# Altium PCB 14X18_Panel_RouteTool_D.PcbDoc
Units mil, origin at the board's own origin, x right, y up, seen from the top; angles counter-clockwise.
Board outline 18000 x 14000 mil, 2 copper layers (Top Layer, Bottom Layer); 51 components, 1 nets, 312 pads, 0 vias.
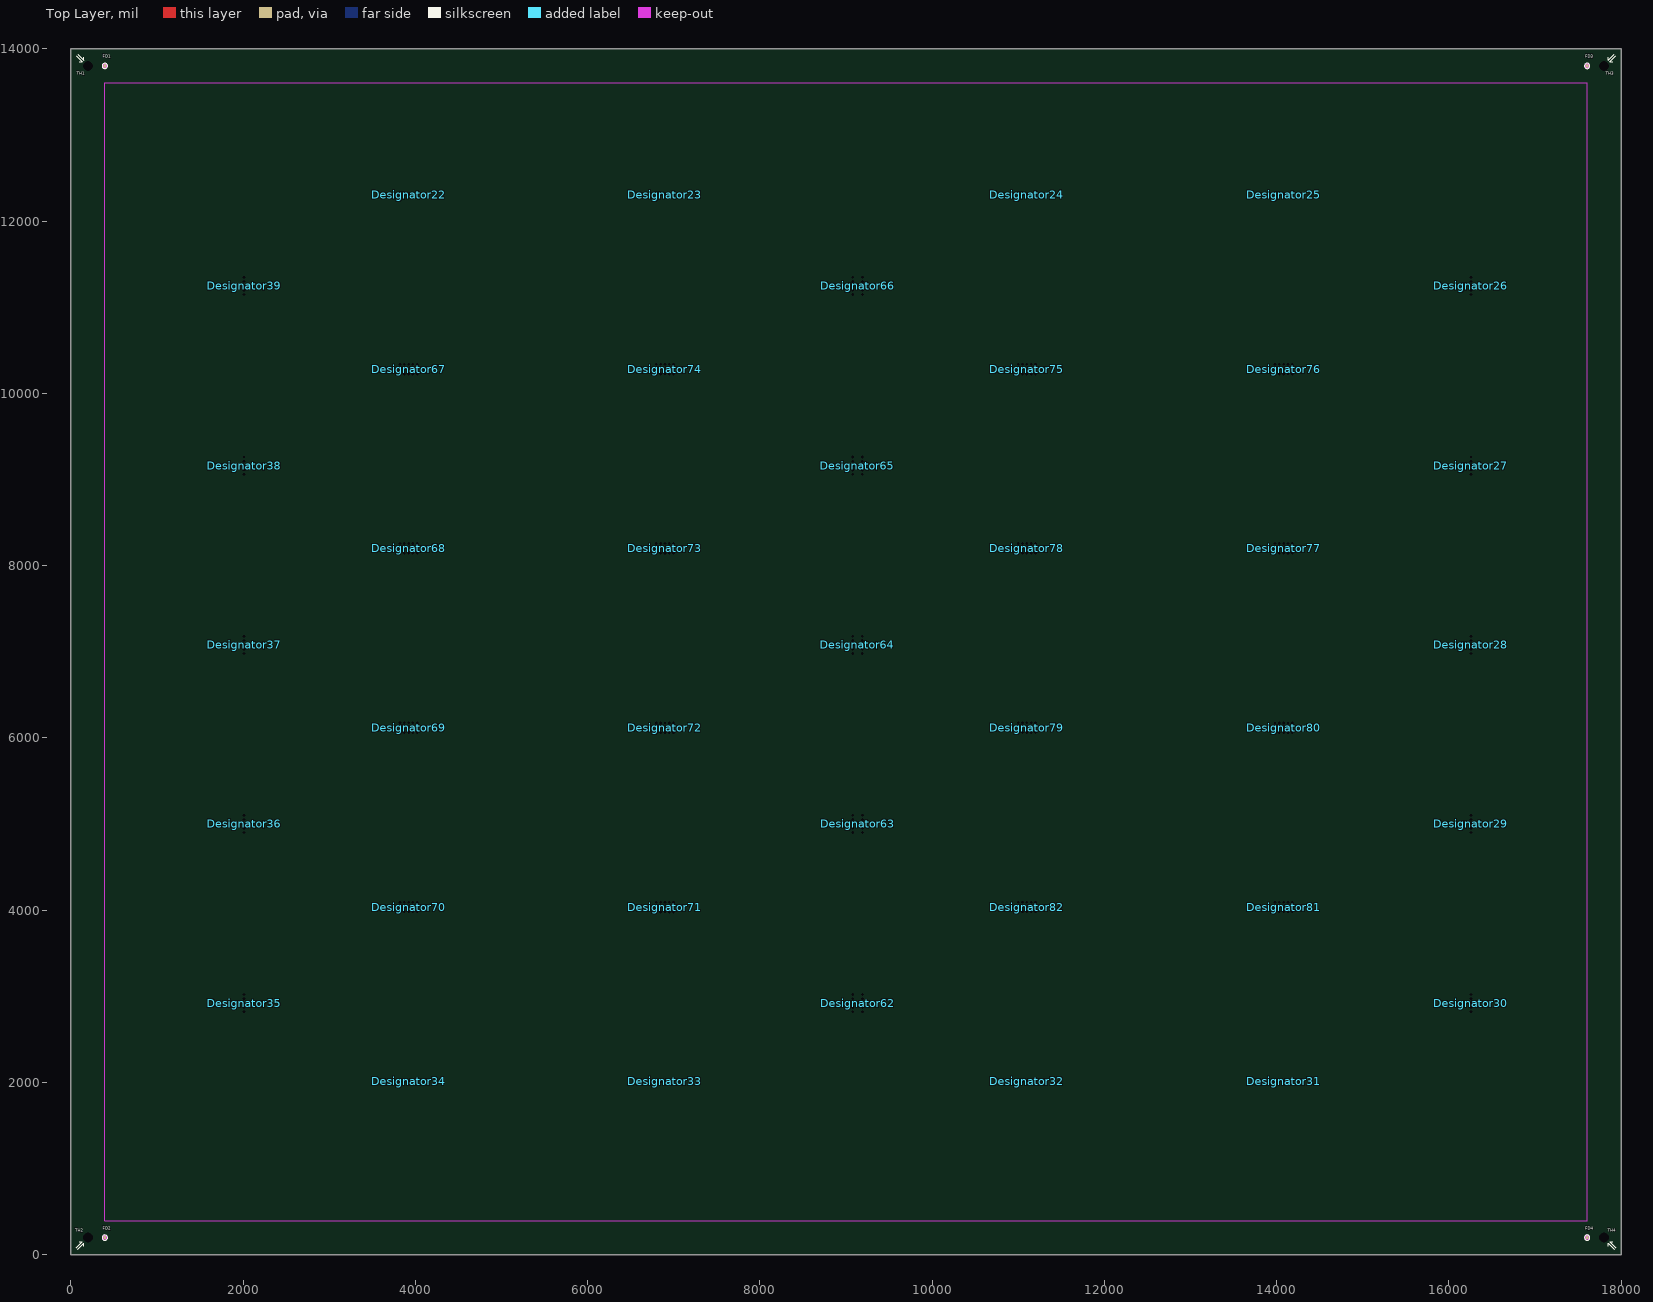
[diagram p0: Top Layer view]
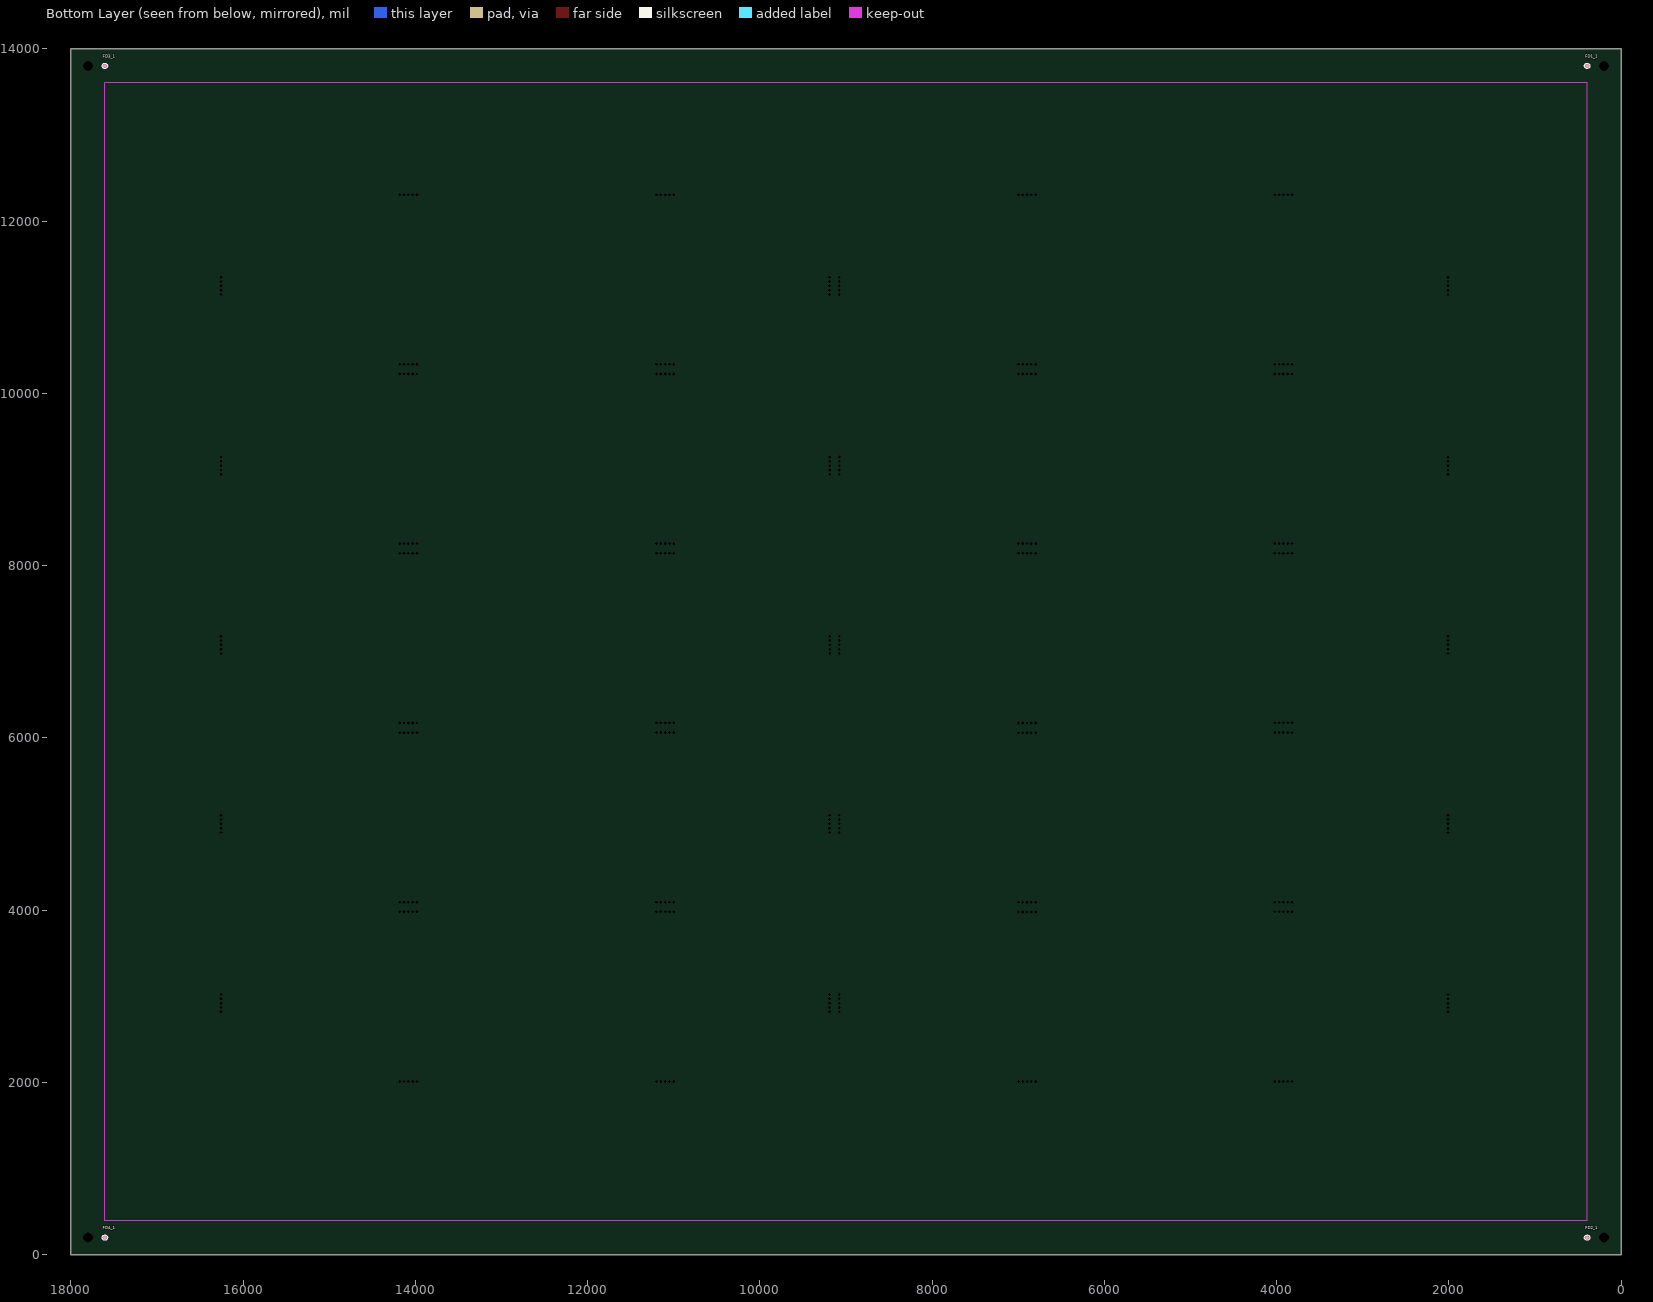
[diagram p1: Bottom Layer view, seen from below]

## Layer stack, top to bottom
Top Solder: solder mask 0.4, Solder Resist, Dk 3.5
Top Layer: signal copper 1.4
Dielectric1: core 12.6, FR-4, Dk 4.8
Bottom Layer: signal copper 1.4
Bottom Solder: solder mask 0.4, Solder Resist, Dk 3.5

## Board outline
0,0 18000,0 18000,14000 0,14000

## Design rules (kind name [scope] priority, off if disabled: settings)
Clearance [All] p1: gap=1 ignorepadtopadclearanceinfootprint=FALSE except(0: Arc-Hole Track-Hole SMDPad-Hole THPad-Hole Via-Hole Fill-Hole Poly-Hole Region-Hole Text-Hole)
PolygonConnect [All] p1: connectstyle=Relief reliefconductorwidth=10 reliefentries=4 polygonreliefangle="90 Angle" airgapwidth=10
RoutingVias [All] p1: holewidth=28 width=50 viastyle="Through Hole" minholewidth=28 minwidth=50 maxholewidth=28 maxwidth=50
SilkToSolderMaskClearance SilkscreenOverComponentPads [IsPad] p1: minsilkscreentomaskgap=2 clearancetoexposedcopper=TRUE
SolderMaskExpansion [All] p1: expansion=4 istentingtop=FALSE
Width [All] p1: maxlimit=10 minlimit=10 preferedwidth=10
29 further rules are at their usual default settings.

## Components (designator, comment, footprint, x,y, rotation, side; value= is the part's Value field where it differs from the comment)
Designator22 "Comment" SINGLE_SIDE_BREAKOUT 3800.63,12365.14 r180 top
Designator23 "Comment" SINGLE_SIDE_BREAKOUT 6777.58,12365.14 r180 top
Designator24 "Comment" SINGLE_SIDE_BREAKOUT 10979.77,12365.14 r180 top
Designator25 "Comment" SINGLE_SIDE_BREAKOUT 13962.12,12365.14 r180 top
Designator26 "Comment" SINGLE_SIDE_BREAKOUT 16314.15,11369.78 r90 top
Designator27 "Comment" SINGLE_SIDE_BREAKOUT 16314.15,9281.76 r90 top
Designator28 "Comment" SINGLE_SIDE_BREAKOUT 16314.15,7200.3 r90 top
Designator29 "Comment" SINGLE_SIDE_BREAKOUT 16314.15,5121.43 r90 top
Designator30 "Comment" SINGLE_SIDE_BREAKOUT 16314.15,3039.62 r90 top
Designator31 "Comment" SINGLE_SIDE_BREAKOUT 14202.12,1953.5 r0 top
Designator32 "Comment" SINGLE_SIDE_BREAKOUT 11219.77,1953.5 r0 top
Designator33 "Comment" SINGLE_SIDE_BREAKOUT 7017.58,1953.5 r0 top
Designator34 "Comment" SINGLE_SIDE_BREAKOUT 4040.63,1953.5 r0 top
Designator35 "Comment" SINGLE_SIDE_BREAKOUT 1953.5,2799.62 r270 top
Designator36 "Comment" SINGLE_SIDE_BREAKOUT 1953.5,4881.43 r270 top
Designator37 "Comment" SINGLE_SIDE_BREAKOUT 1953.5,6960.3 r270 top
Designator38 "Comment" SINGLE_SIDE_BREAKOUT 1953.5,9041.76 r270 top
Designator39 "Comment" SINGLE_SIDE_BREAKOUT 1953.5,11129.78 r270 top
Designator62 "Comment" DOUBLE_SIDE_BREAKOUT 9134.54,2799.62 r270 top
Designator63 "Comment" DOUBLE_SIDE_BREAKOUT 9134.54,4881.43 r270 top
Designator64 "Comment" DOUBLE_SIDE_BREAKOUT 9133.12,6960.3 r270 top
Designator65 "Comment" DOUBLE_SIDE_BREAKOUT 9133.12,9041.76 r270 top
Designator66 "Comment" DOUBLE_SIDE_BREAKOUT 9134.54,11129.78 r270 top
Designator67 "Comment" DOUBLE_SIDE_BREAKOUT 4040.63,10282.53 r0 top
Designator68 "Comment" DOUBLE_SIDE_BREAKOUT 4040.63,8199.92 r0 top
Designator69 "Comment" DOUBLE_SIDE_BREAKOUT 4040.63,6118.72 r0 top
Designator70 "Comment" DOUBLE_SIDE_BREAKOUT 4040.63,4036.11 r0 top
Designator71 "Comment" DOUBLE_SIDE_BREAKOUT 7017.58,4034.69 r0 top
Designator72 "Comment" DOUBLE_SIDE_BREAKOUT 7017.58,6117.3 r0 top
Designator73 "Comment" DOUBLE_SIDE_BREAKOUT 7017.58,8201.34 r0 top
Designator74 "Comment" DOUBLE_SIDE_BREAKOUT 7017.58,10282.53 r0 top
Designator75 "Comment" DOUBLE_SIDE_BREAKOUT 11219.77,10282.53 r0 top
Designator76 "Comment" DOUBLE_SIDE_BREAKOUT 14202.12,10282.53 r0 top
Designator77 "Comment" DOUBLE_SIDE_BREAKOUT 14202.12,8199.92 r0 top
Designator78 "Comment" DOUBLE_SIDE_BREAKOUT 11219.77,8199.92 r0 top
Designator79 "Comment" DOUBLE_SIDE_BREAKOUT 11219.77,6118.72 r0 top
Designator80 "Comment" DOUBLE_SIDE_BREAKOUT 14202.12,6117.3 r0 top
Designator81 "Comment" DOUBLE_SIDE_BREAKOUT 14202.12,4036.11 r0 top
Designator82 "Comment" DOUBLE_SIDE_BREAKOUT 11219.77,4036.11 r0 top
FD1 "Comment" FD_1.20MM 393.7,13803.15 r0 top
FD1_1 "Comment" FD_1.20mm 393.7,13803.15 r0 bottom
FD2 "Comment" FD_1.20MM 393.7,196.85 r0 top
FD2_1 "Comment" FD_1.20mm 393.7,196.85 r0 bottom
FD3 "Comment" FD_1.20MM 17606.3,13803.15 r0 top
FD3_1 "Comment" FD_1.20mm 17606.3,13803.15 r0 bottom
FD4 "Comment" FD_1.20MM 17606.3,196.85 r0 top
FD4_1 "Comment" FD_1.20mm 17606.3,196.85 r0 bottom
TH1 "Comment" TH_3mm 196.85,13803.15 r135 top
TH2 "Comment" TH_3mm 196.85,196.85 r225 top
TH3 "Comment" TH_3mm 17803.15,13803.15 r45 top
TH4 "Comment" TH_3mm 17803.15,196.85 r315 top

## Footprints (in the part's own frame and the unit in brackets; to place one, negate y for a bottom-side part, rotate by r counter-clockwise, add the part's x,y. Pads: shape width x height; smd on the part's side, far side on the other; paste and mask are expansions set on the pad)
DOUBLE_SIDE_BREAKOUT [mil] "Rout Tool Diameter 93 mil Slice Track 240 Mil"
  round 0 hole 31 unplated: 0(-220,-56.5) 0(-220,56.5) 0(-170,-56.5) 0(-170,56.5) 0(-120,56.5) 0(-120,-56.5) 0(-70,56.5) 0(-70,-56.5) 0(-20,56.5) 0(-20,-56.5)
FD_1.20MM [mm] "1.20 mm Fiducial"
  round 1.2 smd paste+0 mask+0.102: 0(0,0)
  Keep-Out Layer circle w0.127: c0,0 r0.635
  silkscreen extent -0.78,-0.79 0.79,0.79
FD_1.20mm [mm] "1.20 mm Fiducial"
  round 1.2 smd paste+0 mask+0.102: 0(0,0)
  Keep-Out Layer circle w0.127: c0,0 r0.635
  silkscreen extent -0.78,-0.79 0.79,0.79
SINGLE_SIDE_BREAKOUT [mil] "Rout Tool Diameter 93 mil Slice Track 240 Mil"
  round 0 hole 31 unplated: 0(-220,56.5) 0(-170,56.5) 0(-120,56.5) 0(-70,56.5) 0(-20,56.5)
TH_3mm [mm] "3 mm Tooling Hole"
  round 0 hole 3 unplated paste+0: 0(0,0)
  silkscreen extent 2.03,-0.89 4.57,0.89

## Nets (pads, with @x,y where several pads share a name; then routed paths per layer and width w, separated by ;. In a path a pad name is that pad's centre, name@x,y a point inside that pad or via, vN(x,y) a via of type N, cw(c..) or ccw(c..) an arc to the next point about the centre after c; other vN are vias at no path point)
NET1: 
pads on no net: Designator22.0 Designator23.0 Designator24.0 Designator25.0 Designator26.0 Designator27.0 Designator28.0 Designator29.0 Designator30.0 Designator31.0 Designator32.0 Designator33.0 Designator34.0 Designator35.0 Designator36.0 Designator37.0 Designator38.0 Designator39.0 Designator62.0 Designator63.0 Designator64.0 Designator65.0 Designator66.0 Designator67.0 Designator68.0 Designator69.0 Designator70.0 Designator71.0 Designator72.0 Designator73.0 Designator74.0 Designator75.0 Designator76.0 Designator77.0 Designator78.0 Designator79.0 Designator80.0 Designator81.0 Designator82.0 FD1.0 FD1_1.0 FD2.0 FD2_1.0 FD3.0 FD3_1.0 FD4.0 FD4_1.0 TH1.0 TH2.0 TH3.0 TH4.0

## Keep-outs
Keep-Out Layer:
  lines w1: 393.7,393.7 17606.3,393.7 17606.3,13606.3 393.7,13606.3 393.7,393.7
  text "KEEP OUT" at 2000,13675.2 h400
  text "KEEP OUT" at 8100,13675.2 h400
  text "KEEP OUT" at 14200,13675.2 h400
  text "KEEP OUT" at 68.9,11000 h400 r270
  text "KEEP OUT" at 17675.2,11000 h400 r270
  text "KEEP OUT" at 68.9,4800 h400 r270
  text "KEEP OUT" at 17675.2,4800 h400 r270
  text "KEEP OUT" at 2000,68.9 h400
  text "KEEP OUT" at 8100,68.9 h400
  text "KEEP OUT" at 14200,68.9 h400

## Silkscreen, mask and mechanical layers (free items; w line width, h text height)
Top Overlay:
  text "Altium Advanced Training: '.Pcb_File_Name_No_Path'" at 15,-1018.35 h200
1_BOARD_OUTLINE:
  the board outline again, w1
Route Tool Path:
  drawing of 180 lines, arcs and shapes, not listed
26_PANEL_DIMENSION:
  lines w10: 17606.3,13803.15 17607.15,13803.15
27_PANEL_FABRICATION_NOTES:
  lines w5: 19592.31,14143.42 19653.56,14143.42 19653.56,14206.47 19592.31,14206.47 19592.31,14143.42 ; 19594.56,13968.24 19655.81,13968.24 19655.81,14031.29 19594.56,14031.29 19594.56,13968.24
  lines w10: 17607.15,13803.15 18226,14422 18893,14422 ; 17803.15,13803.15 18707.85,13803.15 18848.85,13803.15 18892.85,13803.15 ; 18939,13722 19117,13722 19117,13899 18939,13899 18939,13722 ; 18939,14336 18939,14513 19117,14513 19117,14336 18939,14336
  text "2" at 18992.31,14380.84 h180.44
  text "N" at 19604.18,14347.27 h112.15
  text "O" at 19664.13,14347.27 h112.15
  text "T" at 19726.22,14347.27 h112.15
  text "E" at 19771.18,14347.27 h112.15
  text "S" at 19816.14,14347.27 h112.15
  text "U" at 19880.37,14347.27 h112.15
  text "N" at 19940.32,14347.27 h112.15
  text "L" at 20000.27,14347.27 h112.15
  text "E" at 20040.95,14347.27 h112.15
  text "S" at 20085.91,14347.27 h112.15
  text "S" at 20128.73,14347.27 h112.15
  text "O" at 20192.97,14347.27 h112.15
  text "T" at 20255.06,14347.27 h112.15
  text "H" at 20300.02,14347.27 h112.15
  text "E" at 20357.82,14347.27 h112.15
  text "R" at 20402.79,14347.27 h112.15
  text "W" at 20454.17,14347.27 h112.15
  text "I" at 20537.67,14347.27 h112.15
  text "S" at 20561.22,14347.27 h112.15
  text "E" at 20604.04,14347.27 h112.15
  text "S" at 20670.41,14347.27 h112.15
  text "P" at 20713.24,14347.27 h112.15
  text "E" at 20762.48,14347.27 h112.15
  text "C" at 20807.44,14347.27 h112.15
  text "I" at 20856.68,14347.27 h112.15
  text "F" at 20880.24,14347.27 h112.15
  text "I" at 20923.06,14347.27 h112.15
  text "E" at 20946.61,14347.27 h112.15
  text "D" at 20991.57,14347.27 h112.15
  text ":" at 21049.38,14347.27 h112.15
  text "1" at 19616.99,14225.23 h112.15
  text "T" at 19702.41,14225.23 h112.15
  text "O" at 19747.37,14225.23 h112.15
  text "O" at 19809.46,14225.23 h112.15
  text "L" at 19871.55,14225.23 h112.15
  text "I" at 19912.23,14225.23 h112.15
  text "N" at 19935.78,14225.23 h112.15
  text "G" at 19995.73,14225.23 h112.15
  text "H" at 20077.09,14225.23 h112.15
  text "O" at 20134.9,14225.23 h112.15
  text "L" at 20196.99,14225.23 h112.15
  text "E" at 20237.66,14225.23 h112.15
  text "3" at 20304.04,14225.23 h112.15
  text "." at 20351.14,14225.23 h112.15
  text "0" at 20374.69,14225.23 h112.15
  text "0" at 20421.79,14225.23 h112.15
  text "M" at 20490.31,14225.23 h112.15
  text "M" at 20571.67,14225.23 h112.15
  text "O" at 20674.43,14225.23 h112.15
  text "N" at 20736.52,14225.23 h112.15
  text "O" at 20796.47,14225.23 h112.15
  text "-" at 20858.56,14225.23 h112.15
  text "P" at 19702.41,14103.19 h112.15
  text "L" at 19751.65,14103.19 h112.15
  text "A" at 19792.33,14103.19 h112.15
  text "T" at 19845.86,14103.19 h112.15
  text "E" at 19890.82,14103.19 h112.15
  text "D" at 19935.78,14103.19 h112.15
  text "4" at 20015,14103.19 h112.15
  text "P" at 20083.51,14103.19 h112.15
  text "L" at 20132.75,14103.19 h112.15
  text "A" at 20173.43,14103.19 h112.15
  text "C" at 20226.96,14103.19 h112.15
  text "E" at 20276.2,14103.19 h112.15
  text "S" at 20321.16,14103.19 h112.15
  text "2" at 19616.99,13981.15 h112.15
  text "F" at 19702.41,13981.15 h112.15
  text "I" at 19745.23,13981.15 h112.15
  text "D" at 19768.78,13981.15 h112.15
  text "U" at 19826.59,13981.15 h112.15
  text "C" at 19886.54,13981.15 h112.15
  text "I" at 19935.78,13981.15 h112.15
  text "A" at 19959.33,13981.15 h112.15
  text "L" at 20012.86,13981.15 h112.15
  text "1" at 20074.95,13981.15 h112.15
  text "." at 20122.05,13981.15 h112.15
  text "2" at 20145.6,13981.15 h112.15
  text "0" at 20192.7,13981.15 h112.15
  text "M" at 20261.22,13981.15 h112.15
  text "M" at 20342.58,13981.15 h112.15
  text "4" at 20445.34,13981.15 h112.15
  text "P" at 20513.86,13981.15 h112.15
  text "L" at 20563.1,13981.15 h112.15
  text "A" at 20603.78,13981.15 h112.15
  text "C" at 20657.31,13981.15 h112.15
  text "E" at 20706.55,13981.15 h112.15
  text "S" at 20751.51,13981.15 h112.15
  text "1" at 19001.6,13764.53 h180.44
29_PANEL_TITLE_BLOCK:
  drawing of 109 lines, arcs and shapes, not listed
  text "DWG. NO." at 27305.1,18815 h30
  text "REV:" at 28315.1,18815 h30
  text "1" at 1525,18775 h250
  text "2" at 9900,18775 h250
  text "3" at 18250,18775 h250
  text "4" at 26600,18775 h250
  text ".PCB_DWG_NO" at 27520,18725 h50
  text ".PCB_REV" at 28330,18725 h50
  text "T" at -2688,18627.61 h76
  text "H" at -2644.65,18627.61 h76
  text "I" at -2594.64,18627.61 h76
  text "S" at -2574.64,18627.61 h76
  text "D" at -2509.62,18627.61 h76
  text "O" at -2459.61,18627.61 h76
  text "C" at -2404.59,18627.61 h76
  text "U" at -2354.58,18627.61 h76
  text "M" at -2304.57,18627.61 h76
  text "E" at -2246.22,18627.61 h76
  text "N" at -2199.54,18627.61 h76
  text "T" at -2151.2,18627.61 h76
  text "A" at -2087.85,18627.61 h76
  text "N" at -2041.17,18627.61 h76
  text "D" at -1991.16,18627.61 h76
  text "T" at -1922.81,18627.61 h76
  text "H" at -1879.47,18627.61 h76
  text "E" at -1829.45,18627.61 h76
  text "D" at -1764.44,18627.61 h76
  text "A" at -1714.43,18627.61 h76
  text "T" at -1667.75,18627.61 h76
  text "A" at -1626.07,18627.61 h76
  text "D" at -1559.39,18627.61 h76
  text "I" at -1509.37,18627.61 h76
  text "S" at -1491.04,18627.61 h76
  text "C" at -1444.36,18627.61 h76
  text "L" at -1394.35,18627.61 h76
  text "O" at -1356,18627.61 h76
  text "S" at -1300.99,18627.61 h76
  text "E" at -1254.31,18627.61 h76
  text "D" at -1207.63,18627.61 h76
  text "H" at -1139.28,18627.61 h76
  text "E" at -1089.27,18627.61 h76
  text "R" at -1042.59,18627.61 h76
  text "E" at -994.25,18627.61 h76
  text "I" at -947.57,18627.61 h76
  text "N" at -927.57,18627.61 h76
  text "O" at -859.21,18627.61 h76
  text "R" at -804.2,18627.61 h76
  text "REVISIONS" at 28540,18595 h60
  text "H" at -2688,18547.59 h76
  text "E" at -2637.99,18547.59 h76
  text "R" at -2591.31,18547.59 h76
  text "E" at -2541.3,18547.59 h76
  text "W" at -2496.28,18547.59 h76
  text "I" at -2427.93,18547.59 h76
  text "T" at -2409.6,18547.59 h76
  text "H" at -2366.25,18547.59 h76
  text "I" at -2297.9,18547.59 h76
  text "S" at -2277.9,18547.59 h76
  text "T" at -2212.88,18547.59 h76
  text "H" at -2169.54,18547.59 h76
  text "E" at -2119.52,18547.59 h76
  text "P" at -2054.51,18547.59 h76
  text "R" at -2007.83,18547.59 h76
  text "O" at -1957.82,18547.59 h76
  text "P" at -1903.77,18547.59 h76
  text "E" at -1857.09,18547.59 h76
  text "R" at -1810.41,18547.59 h76
  text "T" at -1762.07,18547.59 h76
  text "Y" at -1718.73,18547.59 h76
  text "O" at -1653.71,18547.59 h76
  text "F" at -1600.36,18547.59 h76
  text "A" at -1537.01,18547.59 h76
  text "L" at -1490.34,18547.59 h76
  text "T" at -1453.66,18547.59 h76
  text "I" at -1410.32,18547.59 h76
  text "U" at -1390.31,18547.59 h76
  text "M" at -1340.3,18547.59 h76
  text "L" at -1263.61,18547.59 h76
  text "I" at -1225.27,18547.59 h76
  text "M" at -1205.27,18547.59 h76
  text "I" at -1148.58,18547.59 h76
  text "T" at -1128.58,18547.59 h76
  text "E" at -1085.24,18547.59 h76
  text "D" at -1038.56,18547.59 h76
  text "A" at -970.21,18547.59 h76
  text "N" at -923.53,18547.59 h76
  text "D" at -873.52,18547.59 h76
  text "M" at -803.5,18547.59 h76
  text "A" at -745.15,18547.59 h76
  text "Y" at -700.14,18547.59 h76
  text "ZONE" at 26955,18470 h60
  text "REV" at 27285,18470 h60
  text "DATE" at 29705,18470 h60
  text "B" at -2688,18467.57 h76
  text "E" at -2641.32,18467.57 h76
  text "F" at -2574.64,18467.57 h76
  text "R" at -2531.29,18467.57 h76
  text "E" at -2481.28,18467.57 h76
  text "E" at -2436.27,18467.57 h76
  text "L" at -2389.59,18467.57 h76
  text "Y" at -2351.25,18467.57 h76
  text "D" at -2284.57,18467.57 h76
  text "I" at -2234.55,18467.57 h76
  text "S" at -2216.22,18467.57 h76
  text "T" at -2169.54,18467.57 h76
  text "R" at -2126.88,18467.57 h76
  text "I" at -2078.54,18467.57 h76
  text "B" at -2058.53,18467.57 h76
  text "U" at -2011.86,18467.57 h76
  text "T" at -1961.84,18467.57 h76
  text "E" at -1918.5,18467.57 h76
  text "D" at -1871.82,18467.57 h76
  text "I" at -1803.47,18467.57 h76
  text "N" at -1783.47,18467.57 h76
  text "W" at -1716.78,18467.57 h76
  text "H" at -1648.43,18467.57 h76
  text "O" at -1600.09,18467.57 h76
  text "L" at -1545.07,18467.57 h76
  text "E" at -1506.73,18467.57 h76
  text "." at -1460.05,18467.57 h76
  text "N" at -1421.71,18467.57 h76
  text "O" at -1371.7,18467.57 h76
  text "R" at -1296.68,18467.57 h76
  text "I" at -1248.33,18467.57 h76
  text "G" at -1228.33,18467.57 h76
  text "H" at -1173.32,18467.57 h76
  text "T" at -1124.97,18467.57 h76
  text "S" at -1081.63,18467.57 h76
  text "A" at -1016.61,18467.57 h76
  text "R" at -969.93,18467.57 h76
  text "E" at -919.92,18467.57 h76
  text "DESCRIPTION" at 28300,18465 h60
  text "APPROVED" at 30210,18465 h60
  text "R" at -2688,18387.55 h76
  text "E" at -2637.99,18387.55 h76
  text "S" at -2591.31,18387.55 h76
  text "E" at -2544.63,18387.55 h76
  text "R" at -2497.95,18387.55 h76
  text "V" at -2447.94,18387.55 h76
  text "E" at -2401.26,18387.55 h76
  text "D" at -2354.58,18387.55 h76
  text "O" at -2286.23,18387.55 h76
  text "R" at -2231.22,18387.55 h76
  text "E" at -2161.2,18387.55 h76
  text "X" at -2114.52,18387.55 h76
  text "P" at -2069.51,18387.55 h76
  text "R" at -2022.83,18387.55 h76
  text "E" at -1972.82,18387.55 h76
  text "S" at -1926.14,18387.55 h76
  text "S" at -1879.47,18387.55 h76
  text "O" at -1814.45,18387.55 h76
  text "R" at -1759.44,18387.55 h76
  text "I" at -1691.09,18387.55 h76
  text "M" at -1671.08,18387.55 h76
  text "P" at -1612.73,18387.55 h76
  text "L" at -1566.06,18387.55 h76
  text "I" at -1529.38,18387.55 h76
  text "E" at -1509.37,18387.55 h76
  text "D" at -1462.7,18387.55 h76
  text "W" at -1396.01,18387.55 h76
  text "A" at -1327.66,18387.55 h76
  text "R" at -1280.99,18387.55 h76
  text "A" at -1230.97,18387.55 h76
  text "N" at -1184.29,18387.55 h76
  text "T" at -1135.95,18387.55 h76
  text "E" at -1092.61,18387.55 h76
  text "E" at -1045.93,18387.55 h76
  text "G" at -984.68,18387.55 h76
  text "I" at -929.66,18387.55 h76
  text "V" at -909.66,18387.55 h76
  text "E" at -862.98,18387.55 h76
  text "N" at -816.3,18387.55 h76
  text "." at -767.96,18387.55 h76
  text "A" at 27315,18335 h60
  text "ORIGINAL" at 28375,18335 h60
  text "A" at -2900,15900 h250
  text "A" at 30775,15900 h250
  text "B" at -2900,10550 h250
  text "B" at 30775,10550 h250
  text "C" at -2900,5200 h250
  text "C" at 30775,5200 h250
  text "DWG. NO." at 30815,3744.9 h30 r270
  text ".PCB_DWG_NO" at 30725,3530 h50 r270
  text "REV:" at 30815,2734.9 h30 r270
  text "D" at -2900,-150 h250
  text "D" at 30775,-150 h250
  text "PART NO." at 24750,-1091 h45
  text ".PCB_PART_NUMBER" at 25065,-1091 h45
  text "UNLESS OTHERWISE SPECIFIED DIMENSIONS" at 24770,-1196 h45
  text "APPROVALS" at 26426,-1198.1 h45
  text "DATE" at 27286,-1198.1 h45
  text "2175 SALK AVENUE" at 29505,-1201 h45
  text "AND TOLERANCE ARE IN INCHES AND" at 24825,-1271 h45
  text "DESIGNER:" at 26106,-1278.1 h45
  text "SUITE 200" at 29505,-1291 h45
  text "APPLY TO THE FINISHED PART" at 24935,-1341 h45
  text ".PCB_DESIGNER" at 26426,-1358.1 h60
  text ".PCB_DESIGNER_APP_DATE" at 27156,-1358.1 h50
  text "CARLSBAD, CA 92008" at 29505,-1381.01 h45
  text "TOLERANCE ON:" at 25175,-1466 h45
  text "USA" at 29505,-1471 h45
  text "ENGINEER:" at 26106,-1478.1 h45
  text ".PCB_ENGINEER_APP_DATE" at 27156,-1548.1 h50
  text "2 DEC. PLACE" at 24770,-1556 h40
  text "3 DEC. PLACE" at 25225,-1556 h40
  text "ANGLES" at 25760,-1556 h40
  text ".PCB_ENGINEER" at 26426,-1558.1 h60
  text "TITLE:" at 27620,-1576 h45
  text "CHECKER:" at 26106,-1678.1 h45
  text ".PCB_2_DEC_TOL" at 24825,-1711 h60
  text ".PCB_3_DEC_TOL" at 25260,-1711 h60
  text ".PCB_ANG_TOL" at 25725,-1711 h60
  text ".PCB_TITLE_1" at 27795,-1726 h100
  text ".PCB_CHECKER_APP_DATE" at 27154,-1752.1 h50
  text ".PCB_CHECKER" at 26426,-1758.1 h60
  text "THIRD ANGLE PROJECTION" at 23997,-1771.1 h40
  text "MATERIAL:" at 24770,-1854.1 h45
  text "REFERENCE DOCUMENTS" at 26486,-1898.1 h45
  text "BOM:" at 26106,-1998.1 h45
  text ".PCB_TITLE_2" at 27790,-2021 h100
  text "SEE NOTES" at 25136,-2053.1 h60
  text ".DOC_NO_BOM" at 26426,-2088.1 h60
  text "ASSY DWG:" at 26106,-2188.1 h45
  text ".DOC_NO_ASSY_DWG" at 26426,-2278.1 h60
  text "SIZE:" at 27680,-2311 h45
  text "CAGE CODE:" at 27925,-2311 h45
  text "DWG NO:" at 28925,-2311 h45
  text "REV:" at 30485,-2311 h45
  text "FAB DWG:" at 26106,-2378.1 h45
  text ".PCB_DWG_NO" at 29235,-2451 h100
  text "B" at 27720,-2456 h100
  text ".DOC_NO_FAB_DWG" at 26426,-2463.1 h60
  text ".CAGE_CODE" at 28095,-2466 h100
  text "SCHEMATIC:" at 26106,-2568.1 h45
  text "PRINT DATE:" at 24762,-2569.1 h45
  text "SCALE:" at 27620,-2626 h45
  text "FILE NAME:" at 28225,-2626.1 h45
  text "SHEET:" at 29965,-2626.1 h45
  text ".PRINT_DATE" at 25170,-2638.1 h60
  text ".Printout_Name" at -2644,-2647 h150
  text ".Printout_Name" at -2644,-2647 h150
  text ".Printout_Name" at -2644,-2647 h150
  text ".DOC_NO_SCH_DWG" at 26426,-2658.1 h60
  text ".PCB_FILE_NAME_NO_PATH" at 28568,-2671.1 h60
  text ".PCB_SCALE" at 27890,-2676 h60
  text "OF" at 30415,-2676.1 h45
  text "DOC-104 REV A" at -2700,-2742.1 h20
  text "DOC-104 REV A" at -2700,-2742.1 h20
  text "DOC-104 REV A" at -2700,-2742.1 h20
  text "1" at 1525,-2925 h250
  text "2" at 9900,-2925 h250
  text "3" at 18250,-2925 h250
  text "4" at 26600,-2925 h250
30_PANEL_TITLE_BLOCK_MIRRORED:
  drawing of 109 lines, arcs and shapes, not listed
  text "REV:" at -315.1,18816 h30
  text "DWG. NO." at 694.9,18816 h30
  text "4" at 1400,18776 h250
  text "3" at 9750,18776 h250
  text "2" at 18100,18776 h250
  text "1" at 26475,18776 h250
  text ".PCB_REV" at -330,18726 h50
  text ".PCB_DWG_NO" at 480,18726 h50
  text "R" at 28804.2,18628.61 h76
  text "O" at 28859.22,18628.61 h76
  text "N" at 28927.57,18628.61 h76
  text "I" at 28947.57,18628.61 h76
  text "E" at 28994.25,18628.61 h76
  text "R" at 29042.6,18628.61 h76
  text "E" at 29089.27,18628.61 h76
  text "H" at 29139.29,18628.61 h76
  text "D" at 29207.64,18628.61 h76
  text "E" at 29254.31,18628.61 h76
  text "S" at 29300.99,18628.61 h76
  text "O" at 29356.01,18628.61 h76
  text "L" at 29394.35,18628.61 h76
  text "C" at 29444.36,18628.61 h76
  text "S" at 29491.04,18628.61 h76
  text "I" at 29509.38,18628.61 h76
  text "D" at 29559.39,18628.61 h76
  text "A" at 29626.07,18628.61 h76
  text "T" at 29667.75,18628.61 h76
  text "A" at 29714.43,18628.61 h76
  text "D" at 29764.44,18628.61 h76
  text "E" at 29829.46,18628.61 h76
  text "H" at 29879.47,18628.61 h76
  text "T" at 29922.81,18628.61 h76
  text "D" at 29991.16,18628.61 h76
  text "N" at 30041.17,18628.61 h76
  text "A" at 30087.85,18628.61 h76
  text "T" at 30151.2,18628.61 h76
  text "N" at 30199.55,18628.61 h76
  text "E" at 30246.22,18628.61 h76
  text "M" at 30304.57,18628.61 h76
  text "U" at 30354.58,18628.61 h76
  text "C" at 30404.6,18628.61 h76
  text "O" at 30459.61,18628.61 h76
  text "D" at 30509.62,18628.61 h76
  text "S" at 30574.64,18628.61 h76
  text "I" at 30594.64,18628.61 h76
  text "H" at 30644.66,18628.61 h76
  text "T" at 30688,18628.61 h76
  text "REVISIONS" at -540,18596 h60
  text "Y" at 28700.14,18548.59 h76
  text "A" at 28745.15,18548.59 h76
  text "M" at 28803.5,18548.59 h76
  text "D" at 28873.52,18548.59 h76
  text "N" at 28923.53,18548.59 h76
  text "A" at 28970.21,18548.59 h76
  text "D" at 29038.56,18548.59 h76
  text "E" at 29085.24,18548.59 h76
  text "T" at 29128.58,18548.59 h76
  text "I" at 29148.59,18548.59 h76
  text "M" at 29205.27,18548.59 h76
  text "I" at 29225.27,18548.59 h76
  text "L" at 29263.62,18548.59 h76
  text "M" at 29340.3,18548.59 h76
  text "U" at 29390.31,18548.59 h76
  text "I" at 29410.32,18548.59 h76
  text "T" at 29453.66,18548.59 h76
  text "L" at 29490.34,18548.59 h76
  text "A" at 29537.02,18548.59 h76
  text "F" at 29600.36,18548.59 h76
  text "O" at 29653.71,18548.59 h76
  text "Y" at 29718.73,18548.59 h76
  text "T" at 29762.07,18548.59 h76
  text "R" at 29810.42,18548.59 h76
  text "E" at 29857.09,18548.59 h76
  text "P" at 29903.77,18548.59 h76
  text "O" at 29957.82,18548.59 h76
  text "R" at 30007.83,18548.59 h76
  text "P" at 30054.51,18548.59 h76
  text "E" at 30119.53,18548.59 h76
  text "H" at 30169.54,18548.59 h76
  text "T" at 30212.88,18548.59 h76
  text "S" at 30277.9,18548.59 h76
  text "I" at 30297.9,18548.59 h76
  text "H" at 30366.25,18548.59 h76
  text "T" at 30409.6,18548.59 h76
  text "I" at 30427.94,18548.59 h76
  text "W" at 30496.29,18548.59 h76
  text "E" at 30541.3,18548.59 h76
  text "R" at 30591.31,18548.59 h76
  text "E" at 30637.99,18548.59 h76
  text "H" at 30688,18548.59 h76
  text "DATE" at -1705,18471 h60
  text "REV" at 715,18471 h60
  text "ZONE" at 1045,18471 h60
  text "E" at 28919.92,18468.57 h76
  text "R" at 28969.93,18468.57 h76
  text "A" at 29016.61,18468.57 h76
  text "S" at 29081.63,18468.57 h76
  text "T" at 29124.97,18468.57 h76
  text "H" at 29173.32,18468.57 h76
  text "G" at 29228.33,18468.57 h76
  text "I" at 29248.34,18468.57 h76
  text "R" at 29296.68,18468.57 h76
  text "O" at 29371.7,18468.57 h76
  text "N" at 29421.71,18468.57 h76
  text "." at 29460.06,18468.57 h76
  text "E" at 29506.73,18468.57 h76
  text "L" at 29545.08,18468.57 h76
  text "O" at 29600.09,18468.57 h76
  text "H" at 29648.44,18468.57 h76
  text "W" at 29716.79,18468.57 h76
  text "N" at 29783.47,18468.57 h76
  text "I" at 29803.47,18468.57 h76
  text "D" at 29871.82,18468.57 h76
  text "E" at 29918.5,18468.57 h76
  text "T" at 29961.85,18468.57 h76
  text "U" at 30011.86,18468.57 h76
  text "B" at 30058.54,18468.57 h76
  text "I" at 30078.54,18468.57 h76
  text "R" at 30126.89,18468.57 h76
  text "T" at 30169.54,18468.57 h76
  text "S" at 30216.22,18468.57 h76
  text "I" at 30234.56,18468.57 h76
  text "D" at 30284.57,18468.57 h76
  text "Y" at 30351.25,18468.57 h76
  text "L" at 30389.59,18468.57 h76
  text "E" at 30436.27,18468.57 h76
  text "E" at 30481.28,18468.57 h76
  text "R" at 30531.29,18468.57 h76
  text "F" at 30574.64,18468.57 h76
  text "E" at 30641.32,18468.57 h76
  text "B" at 30688,18468.57 h76
  text "APPROVED" at -2210,18466 h60
  text "DESCRIPTION" at -300,18466 h60
  text "." at 28767.96,18388.55 h76
  text "N" at 28816.3,18388.55 h76
  text "E" at 28862.98,18388.55 h76
  text "V" at 28909.66,18388.55 h76
  text "I" at 28929.66,18388.55 h76
  text "G" at 28984.68,18388.55 h76
  text "E" at 29045.93,18388.55 h76
  text "E" at 29092.61,18388.55 h76
  text "T" at 29135.95,18388.55 h76
  text "N" at 29184.3,18388.55 h76
  text "A" at 29230.97,18388.55 h76
  text "R" at 29280.99,18388.55 h76
  text "A" at 29327.67,18388.55 h76
  text "W" at 29396.02,18388.55 h76
  text "D" at 29462.7,18388.55 h76
  text "E" at 29509.38,18388.55 h76
  text "I" at 29529.38,18388.55 h76
  text "L" at 29566.06,18388.55 h76
  text "P" at 29612.74,18388.55 h76
  text "M" at 29671.08,18388.55 h76
  text "I" at 29691.09,18388.55 h76
  text "R" at 29759.44,18388.55 h76
  text "O" at 29814.45,18388.55 h76
  text "S" at 29879.47,18388.55 h76
  text "S" at 29926.15,18388.55 h76
  text "E" at 29972.82,18388.55 h76
  text "R" at 30022.84,18388.55 h76
  text "P" at 30069.51,18388.55 h76
  text "X" at 30114.53,18388.55 h76
  text "E" at 30161.2,18388.55 h76
  text "R" at 30231.22,18388.55 h76
  text "O" at 30286.23,18388.55 h76
  text "D" at 30354.58,18388.55 h76
  text "E" at 30401.26,18388.55 h76
  text "V" at 30447.94,18388.55 h76
  text "R" at 30497.95,18388.55 h76
  text "E" at 30544.63,18388.55 h76
  text "S" at 30591.31,18388.55 h76
  text "E" at 30637.99,18388.55 h76
  text "R" at 30688,18388.55 h76
  text "ORIGINAL" at -375,18336 h60
  text "A" at 685,18336 h60
  text "A" at -2775,15901 h250
  text "A" at 30900,15901 h250
  text "B" at -2775,10551 h250
  text "B" at 30900,10551 h250
  text "C" at -2775,5201 h250
  text "C" at 30900,5201 h250
  text "DWG. NO." at -2815,3745.9 h30 r90
  text ".PCB_DWG_NO" at -2725,3531 h50 r90
  text "REV:" at -2815,2735.9 h30 r90
  text "D" at -2775,-149 h250
  text "D" at 30900,-149 h250
  text ".PCB_PART_NUMBER" at 2935,-1090 h45
  text "PART NO." at 3250,-1090 h45
  text "UNLESS OTHERWISE SPECIFIED DIMENSIONS" at 3230,-1195 h45
  text "DATE" at 714,-1197.1 h45
  text "APPROVALS" at 1574,-1197.1 h45
  text "2175 SALK AVENUE" at -1505,-1200 h45
  text "AND TOLERANCE ARE IN INCHES AND" at 3175,-1270 h45
  text "DESIGNER:" at 1894,-1277.1 h45
  text "SUITE 200" at -1505,-1290 h45
  text "APPLY TO THE FINISHED PART" at 3065,-1340 h45
  text ".PCB_DESIGNER_APP_DATE" at 844,-1357.1 h50
  text ".PCB_DESIGNER" at 1574,-1357.1 h60
  text "CARLSBAD, CA 92008" at -1505,-1380.01 h45
  text "TOLERANCE ON:" at 2825,-1465 h45
  text "USA" at -1505,-1470 h45
  text "ENGINEER:" at 1894,-1477.1 h45
  text ".PCB_ENGINEER_APP_DATE" at 844,-1547.1 h50
  text "ANGLES" at 2240,-1555 h40
  text "3 DEC. PLACE" at 2775,-1555 h40
  text "2 DEC. PLACE" at 3230,-1555 h40
  text ".PCB_ENGINEER" at 1574,-1557.1 h60
  text "TITLE:" at 380,-1575 h45
  text "CHECKER:" at 1894,-1677.1 h45
  text ".PCB_ANG_TOL" at 2275,-1710 h60
  text ".PCB_3_DEC_TOL" at 2740,-1710 h60
  text ".PCB_2_DEC_TOL" at 3175,-1710 h60
  text ".PCB_TITLE_1" at 205,-1725 h100
  text ".PCB_CHECKER_APP_DATE" at 846,-1751.1 h50
  text ".PCB_CHECKER" at 1574,-1757.1 h60
  text "THIRD ANGLE PROJECTION" at 4003,-1770.1 h40
  text "MATERIAL:" at 3230,-1853.1 h45
  text "REFERENCE DOCUMENTS" at 1514,-1897.1 h45
  text "BOM:" at 1894,-1997.1 h45
  text ".PCB_TITLE_2" at 210,-2020 h100
  text "SEE NOTES" at 2864,-2052.1 h60
  text ".DOC_NO_BOM" at 1574,-2087.1 h60
  text "ASSY DWG:" at 1894,-2187.1 h45
  text ".DOC_NO_ASSY_DWG" at 1574,-2277.1 h60
  text "REV:" at -2485,-2310 h45
  text "DWG NO:" at -925,-2310 h45
  text "CAGE CODE:" at 75,-2310 h45
  text "SIZE:" at 320,-2310 h45
  text "FAB DWG:" at 1894,-2377.1 h45
  text ".PCB_DWG_NO" at -1235,-2450 h100
  text "B" at 280,-2455 h100
  text ".DOC_NO_FAB_DWG" at 1574,-2462.1 h60
  text ".CAGE_CODE" at -95,-2465 h100
  text "SCHEMATIC:" at 1894,-2567.1 h45
  text "PRINT DATE:" at 3238,-2568.1 h45
  text "SHEET:" at -1965,-2625.1 h45
  text "FILE NAME:" at -225,-2625.1 h45
  text "SCALE:" at 380,-2625 h45
  text ".PRINT_DATE" at 2830,-2637.1 h60
  text ".Printout_Name" at 30644,-2646 h150
  text ".Printout_Name" at 30644,-2646 h150
  text ".Printout_Name" at 30644,-2646 h150
  text ".DOC_NO_SCH_DWG" at 1574,-2657.1 h60
  text ".PCB_FILE_NAME_NO_PATH" at -568,-2670.1 h60
  text "OF" at -2415,-2675.1 h45
  text ".PCB_SCALE" at 110,-2675 h60
  text "DOC-104 REV A" at 30700,-2741.1 h20
  text "DOC-104 REV A" at 30700,-2741.1 h20
  text "DOC-104 REV A" at 30700,-2741.1 h20
  text "4" at 1400,-2924 h250
  text "3" at 9750,-2924 h250
  text "2" at 18100,-2924 h250
  text "1" at 26475,-2924 h250
31_PANEL_CONTINUATION_BLOCK:
  lines w1: -3000,-3000 31000,-3000 31000,19000 -3000,19000 -3000,-3000 ; -2700,-2700 -2700,18700 30700,18700 30700,-2700 -2700,-2700
  lines w5: 26200,-2701 30700,-2701 30700,-1501 ; 26905,18175 30698,18175 ; 26905,18305 30698,18305 ; 26905,18435 30698,18435 ; 26905,18565 30698,18565 ; 26905,18695 26905,18045 30698,18045 ; 27205,18045 27205,18565 ; 27290,18700 27290,18849 28400,18849 28400,18700 ; 27505,18045 27505,18565 ; 27595,-2701 27595,-2551 ; 27900,-2551 27900,-2236 ; 28200,-2701 28200,-2551 ; 28290,18700 28290,18849 ; 28900,-2551 28900,-2236 ; 29505,18045 29505,18565 ; 29940,-2701.1 29940,-2551.1 ; 30105,18045 30105,18565 ; 30400,-2551 30400,-2236 ; 30700,-2551 27595,-2551 ; 30700,-2236 27595,-2236 27595,-2551 ; 30700,2650 30849,2650 30849,3760 30700,3760 ; 30700,2760 30849,2760 ; -2700,-2700 177,-2700 ; -2700,-2700 -2700,-2504 ; -2700,-2700 177,-2700 ; -2700,-2700 -2700,-2504 ; -2700,-2700 -2700,-2504 ; -2700,-2700 177,-2700 ; -2700,-2504 177,-2504 ; -2700,-2504 177,-2504 ; -2700,-2504 177,-2504 ; 177,-2700 177,-2504 ; 177,-2700 177,-2504 ; 177,-2700 177,-2504 ; -2700,18370 -2700,18700 -640,18700 -640,18370 -2700,18370
  lines w10: -3000,2650 -2700,2650 ; -3000,8000 -2700,8000 ; -3000,13350 -2700,13350 ; 5650,-3000 5650,-2700 ; 5650,18700 5650,19000 ; 14000,-3000 14000,-2700 ; 14000,18700 14000,19000 ; 22350,-3000 22350,-2700 ; 22350,18700 22350,19000 ; 30700,2650 31000,2650 ; 30700,8000 31000,8000 ; 30700,13350 31000,13350
  text "DWG. NO." at 27305.1,18815 h30
  text "REV:" at 28315.1,18815 h30
  text "1" at 1525,18775 h250
  text "2" at 9900,18775 h250
  text "3" at 18250,18775 h250
  text "4" at 26600,18775 h250
  text ".PCB_DWG_NO" at 27520,18725 h50
  text ".PCB_REV" at 28330,18725 h50
  text "T" at -2688,18627.61 h76
  text "H" at -2644.65,18627.61 h76
  text "I" at -2594.64,18627.61 h76
  text "S" at -2574.64,18627.61 h76
  text "D" at -2509.62,18627.61 h76
  text "O" at -2459.61,18627.61 h76
  text "C" at -2404.59,18627.61 h76
  text "U" at -2354.58,18627.61 h76
  text "M" at -2304.57,18627.61 h76
  text "E" at -2246.22,18627.61 h76
  text "N" at -2199.54,18627.61 h76
  text "T" at -2151.2,18627.61 h76
  text "A" at -2087.85,18627.61 h76
  text "N" at -2041.17,18627.61 h76
  text "D" at -1991.16,18627.61 h76
  text "T" at -1922.81,18627.61 h76
  text "H" at -1879.47,18627.61 h76
  text "E" at -1829.45,18627.61 h76
  text "D" at -1764.44,18627.61 h76
  text "A" at -1714.43,18627.61 h76
  text "T" at -1667.75,18627.61 h76
  text "A" at -1626.07,18627.61 h76
  text "D" at -1559.39,18627.61 h76
  text "I" at -1509.37,18627.61 h76
  text "S" at -1491.04,18627.61 h76
  text "C" at -1444.36,18627.61 h76
  text "L" at -1394.35,18627.61 h76
  text "O" at -1356,18627.61 h76
  text "S" at -1300.99,18627.61 h76
  text "E" at -1254.31,18627.61 h76
  text "D" at -1207.63,18627.61 h76
  text "H" at -1139.28,18627.61 h76
  text "E" at -1089.27,18627.61 h76
  text "R" at -1042.59,18627.61 h76
  text "E" at -994.25,18627.61 h76
  text "I" at -947.57,18627.61 h76
  text "N" at -927.57,18627.61 h76
  text "O" at -859.21,18627.61 h76
  text "R" at -804.2,18627.61 h76
  text "REVISIONS" at 28540,18595 h60
  text "H" at -2688,18547.59 h76
  text "E" at -2637.99,18547.59 h76
  text "R" at -2591.31,18547.59 h76
  text "E" at -2541.3,18547.59 h76
  text "W" at -2496.28,18547.59 h76
  text "I" at -2427.93,18547.59 h76
  text "T" at -2409.6,18547.59 h76
  text "H" at -2366.25,18547.59 h76
  text "I" at -2297.9,18547.59 h76
  text "S" at -2277.9,18547.59 h76
  text "T" at -2212.88,18547.59 h76
  text "H" at -2169.54,18547.59 h76
  text "E" at -2119.52,18547.59 h76
  text "P" at -2054.51,18547.59 h76
  text "R" at -2007.83,18547.59 h76
  text "O" at -1957.82,18547.59 h76
  text "P" at -1903.77,18547.59 h76
  text "E" at -1857.09,18547.59 h76
  text "R" at -1810.41,18547.59 h76
  text "T" at -1762.07,18547.59 h76
  text "Y" at -1718.73,18547.59 h76
  text "O" at -1653.71,18547.59 h76
  text "F" at -1600.36,18547.59 h76
  text "A" at -1537.01,18547.59 h76
  text "L" at -1490.34,18547.59 h76
  text "T" at -1453.66,18547.59 h76
  text "I" at -1410.32,18547.59 h76
  text "U" at -1390.31,18547.59 h76
  text "M" at -1340.3,18547.59 h76
  text "L" at -1263.61,18547.59 h76
  text "I" at -1225.27,18547.59 h76
  text "M" at -1205.27,18547.59 h76
  text "I" at -1148.58,18547.59 h76
  text "T" at -1128.58,18547.59 h76
  text "E" at -1085.24,18547.59 h76
  text "D" at -1038.56,18547.59 h76
  text "A" at -970.21,18547.59 h76
  text "N" at -923.53,18547.59 h76
  text "D" at -873.52,18547.59 h76
  text "M" at -803.5,18547.59 h76
  text "A" at -745.15,18547.59 h76
  text "Y" at -700.14,18547.59 h76
  text "ZONE" at 26955,18470 h60
  text "REV" at 27285,18470 h60
  text "DATE" at 29705,18470 h60
  text "B" at -2688,18467.57 h76
  text "E" at -2641.32,18467.57 h76
  text "F" at -2574.64,18467.57 h76
  text "R" at -2531.29,18467.57 h76
  text "E" at -2481.28,18467.57 h76
  text "E" at -2436.27,18467.57 h76
  text "L" at -2389.59,18467.57 h76
  text "Y" at -2351.25,18467.57 h76
  text "D" at -2284.57,18467.57 h76
  text "I" at -2234.55,18467.57 h76
  text "S" at -2216.22,18467.57 h76
  text "T" at -2169.54,18467.57 h76
  text "R" at -2126.88,18467.57 h76
  text "I" at -2078.54,18467.57 h76
  text "B" at -2058.53,18467.57 h76
  text "U" at -2011.86,18467.57 h76
  text "T" at -1961.84,18467.57 h76
  text "E" at -1918.5,18467.57 h76
  text "D" at -1871.82,18467.57 h76
  text "I" at -1803.47,18467.57 h76
  text "N" at -1783.47,18467.57 h76
  text "W" at -1716.78,18467.57 h76
  text "H" at -1648.43,18467.57 h76
  text "O" at -1600.09,18467.57 h76
  text "L" at -1545.07,18467.57 h76
  text "E" at -1506.73,18467.57 h76
  text "." at -1460.05,18467.57 h76
  text "N" at -1421.71,18467.57 h76
  text "O" at -1371.7,18467.57 h76
  text "R" at -1296.68,18467.57 h76
  text "I" at -1248.33,18467.57 h76
  text "G" at -1228.33,18467.57 h76
  text "H" at -1173.32,18467.57 h76
  text "T" at -1124.97,18467.57 h76
  text "S" at -1081.63,18467.57 h76
  text "A" at -1016.61,18467.57 h76
  text "R" at -969.93,18467.57 h76
  text "E" at -919.92,18467.57 h76
  text "DESCRIPTION" at 28300,18465 h60
  text "APPROVED" at 30210,18465 h60
  text "R" at -2688,18387.55 h76
  text "E" at -2637.99,18387.55 h76
  text "S" at -2591.31,18387.55 h76
  text "E" at -2544.63,18387.55 h76
  text "R" at -2497.95,18387.55 h76
  text "V" at -2447.94,18387.55 h76
  text "E" at -2401.26,18387.55 h76
  text "D" at -2354.58,18387.55 h76
  text "O" at -2286.23,18387.55 h76
  text "R" at -2231.22,18387.55 h76
  text "E" at -2161.2,18387.55 h76
  text "X" at -2114.52,18387.55 h76
  text "P" at -2069.51,18387.55 h76
  text "R" at -2022.83,18387.55 h76
  text "E" at -1972.82,18387.55 h76
  text "S" at -1926.14,18387.55 h76
  text "S" at -1879.47,18387.55 h76
  text "O" at -1814.45,18387.55 h76
  text "R" at -1759.44,18387.55 h76
  text "I" at -1691.09,18387.55 h76
  text "M" at -1671.08,18387.55 h76
  text "P" at -1612.73,18387.55 h76
  text "L" at -1566.06,18387.55 h76
  text "I" at -1529.38,18387.55 h76
  text "E" at -1509.37,18387.55 h76
  text "D" at -1462.7,18387.55 h76
  text "W" at -1396.01,18387.55 h76
  text "A" at -1327.66,18387.55 h76
  text "R" at -1280.99,18387.55 h76
  text "A" at -1230.97,18387.55 h76
  text "N" at -1184.29,18387.55 h76
  text "T" at -1135.95,18387.55 h76
  text "E" at -1092.61,18387.55 h76
  text "E" at -1045.93,18387.55 h76
  text "G" at -984.68,18387.55 h76
  text "I" at -929.66,18387.55 h76
  text "V" at -909.66,18387.55 h76
  text "E" at -862.98,18387.55 h76
  text "N" at -816.3,18387.55 h76
  text "." at -767.96,18387.55 h76
  text "A" at 27315,18335 h60
  text "ORIGINAL" at 28375,18335 h60
  text "A" at -2900,15900 h250
  text "A" at 30775,15900 h250
  text "B" at -2900,10550 h250
  text "B" at 30775,10550 h250
  text "C" at -2900,5200 h250
  text "C" at 30775,5200 h250
  text "DWG. NO." at 30815,3744.9 h30 r270
  text ".PCB_DWG_NO" at 30725,3530 h50 r270
  text "REV:" at 30815,2734.9 h30 r270
  text "D" at -2900,-150 h250
  text "D" at 30775,-150 h250
  text "SIZE:" at 27680,-2311 h45
  text "CAGE CODE:" at 27925,-2311 h45
  text "DWG NO:" at 28925,-2311 h45
  text "REV:" at 30485,-2311 h45
  text ".PCB_DWG_NO" at 29235,-2451 h100
  text "B" at 27720,-2456 h100
  text ".CAGE_CODE" at 28095,-2466 h100
  text "SCALE:" at 27620,-2626 h45
  text "FILE NAME:" at 28225,-2626.1 h45
  text "SHEET:" at 29965,-2626.1 h45
  text ".Printout_Name" at -2644,-2647 h150
  text ".Printout_Name" at -2644,-2647 h150
  text ".Printout_Name" at -2644,-2647 h150
  text ".PCB_FILE_NAME_NO_PATH" at 28568,-2671.1 h60
  text ".PCB_SCALE" at 27890,-2676 h60
  text "OF" at 30415,-2676.1 h45
  text "DOC-104 REV A" at -2700,-2742.1 h20
  text "DOC-104 REV A" at -2700,-2742.1 h20
  text "DOC-104 REV A" at -2700,-2742.1 h20
  text "1" at 1525,-2925 h250
  text "2" at 9900,-2925 h250
  text "3" at 18250,-2925 h250
  text "4" at 26600,-2925 h250
32_PANEL_CONTINUATION_BLOCK_MIRRORED:
  lines w1: -3000,-2999 31000,-2999 31000,19001 -3000,19001 -3000,-2999 ; -2700,-2699 -2700,18701 30700,18701 30700,-2699 -2700,-2699
  lines w5: -2849,2761 -2700,2761 ; -2700,-2550 405,-2550 ; -2700,-2235 405,-2235 405,-2550 ; -2700,-1500 -2700,-2700 1800,-2700 ; -2700,2651 -2849,2651 -2849,3761 -2700,3761 ; -2698,18046 1095,18046 1095,18696 ; -2698,18176 1095,18176 ; -2698,18306 1095,18306 ; -2698,18436 1095,18436 ; -2698,18566 1095,18566 ; -2400,-2550 -2400,-2235 ; -2105,18046 -2105,18566 ; -1940,-2700.1 -1940,-2550.1 ; -1505,18046 -1505,18566 ; -900,-2550 -900,-2235 ; -400,18701 -400,18850 710,18850 710,18701 ; -290,18701 -290,18850 ; -200,-2700 -200,-2550 ; 100,-2550 100,-2235 ; 405,-2700 405,-2550 ; 495,18046 495,18566 ; 795,18046 795,18566 ; 27823,-2699 27823,-2503 ; 27823,-2699 30700,-2699 ; 27823,-2699 30700,-2699 ; 27823,-2699 27823,-2503 ; 27823,-2699 30700,-2699 ; 27823,-2699 27823,-2503 ; 27823,-2503 30700,-2503 ; 27823,-2503 30700,-2503 ; 27823,-2503 30700,-2503 ; 30700,-2699 30700,-2503 ; 30700,-2699 30700,-2503 ; 30700,-2699 30700,-2503 ; 28640,18371 28640,18701 30700,18701 30700,18371 28640,18371
  lines w10: -3000,2651 -2700,2651 ; -3000,8001 -2700,8001 ; -3000,13351 -2700,13351 ; 5650,-2999 5650,-2699 ; 5650,18701 5650,19001 ; 14000,-2999 14000,-2699 ; 14000,18701 14000,19001 ; 22350,-2999 22350,-2699 ; 22350,18701 22350,19001 ; 30700,2651 31000,2651 ; 30700,8001 31000,8001 ; 30700,13351 31000,13351
  text "REV:" at -315.09,18816 h30
  text "DWG. NO." at 694.91,18816 h30
  text "4" at 1400,18776 h250
  text "3" at 9750,18776 h250
  text "2" at 18100,18776 h250
  text "1" at 26475,18776 h250
  text ".PCB_REV" at -330,18726 h50
  text ".PCB_DWG_NO" at 480,18726 h50
  text "R" at 28804.21,18628.61 h76
  text "O" at 28859.22,18628.61 h76
  text "N" at 28927.57,18628.61 h76
  text "I" at 28947.57,18628.61 h76
  text "E" at 28994.25,18628.61 h76
  text "R" at 29042.6,18628.61 h76
  text "E" at 29089.28,18628.61 h76
  text "H" at 29139.29,18628.61 h76
  text "D" at 29207.64,18628.61 h76
  text "E" at 29254.32,18628.61 h76
  text "S" at 29300.99,18628.61 h76
  text "O" at 29356.01,18628.61 h76
  text "L" at 29394.35,18628.61 h76
  text "C" at 29444.36,18628.61 h76
  text "S" at 29491.04,18628.61 h76
  text "I" at 29509.38,18628.61 h76
  text "D" at 29559.39,18628.61 h76
  text "A" at 29626.07,18628.61 h76
  text "T" at 29667.75,18628.61 h76
  text "A" at 29714.43,18628.61 h76
  text "D" at 29764.44,18628.61 h76
  text "E" at 29829.46,18628.61 h76
  text "H" at 29879.47,18628.61 h76
  text "T" at 29922.81,18628.61 h76
  text "D" at 29991.16,18628.61 h76
  text "N" at 30041.18,18628.61 h76
  text "A" at 30087.85,18628.61 h76
  text "T" at 30151.2,18628.61 h76
  text "N" at 30199.55,18628.61 h76
  text "E" at 30246.23,18628.61 h76
  text "M" at 30304.57,18628.61 h76
  text "U" at 30354.59,18628.61 h76
  text "C" at 30404.6,18628.61 h76
  text "O" at 30459.61,18628.61 h76
  text "D" at 30509.62,18628.61 h76
  text "S" at 30574.64,18628.61 h76
  text "I" at 30594.65,18628.61 h76
  text "H" at 30644.66,18628.61 h76
  text "T" at 30688,18628.61 h76
  text "REVISIONS" at -540,18596 h60
  text "Y" at 28700.15,18548.59 h76
  text "A" at 28745.16,18548.59 h76
  text "M" at 28803.5,18548.59 h76
  text "D" at 28873.52,18548.59 h76
  text "N" at 28923.53,18548.59 h76
  text "A" at 28970.21,18548.59 h76
  text "D" at 29038.56,18548.59 h76
  text "E" at 29085.24,18548.59 h76
  text "T" at 29128.58,18548.59 h76
  text "I" at 29148.59,18548.59 h76
  text "M" at 29205.27,18548.59 h76
  text "I" at 29225.27,18548.59 h76
  text "L" at 29263.62,18548.59 h76
  text "M" at 29340.3,18548.59 h76
  text "U" at 29390.32,18548.59 h76
  text "I" at 29410.32,18548.59 h76
  text "T" at 29453.66,18548.59 h76
  text "L" at 29490.34,18548.59 h76
  text "A" at 29537.02,18548.59 h76
  text "F" at 29600.37,18548.59 h76
  text "O" at 29653.71,18548.59 h76
  text "Y" at 29718.73,18548.59 h76
  text "T" at 29762.07,18548.59 h76
  text "R" at 29810.42,18548.59 h76
  text "E" at 29857.1,18548.59 h76
  text "P" at 29903.77,18548.59 h76
  text "O" at 29957.82,18548.59 h76
  text "R" at 30007.83,18548.59 h76
  text "P" at 30054.51,18548.59 h76
  text "E" at 30119.53,18548.59 h76
  text "H" at 30169.54,18548.59 h76
  text "T" at 30212.89,18548.59 h76
  text "S" at 30277.9,18548.59 h76
  text "I" at 30297.91,18548.59 h76
  text "H" at 30366.26,18548.59 h76
  text "T" at 30409.6,18548.59 h76
  text "I" at 30427.94,18548.59 h76
  text "W" at 30496.29,18548.59 h76
  text "E" at 30541.3,18548.59 h76
  text "R" at 30591.31,18548.59 h76
  text "E" at 30637.99,18548.59 h76
  text "H" at 30688,18548.59 h76
  text "DATE" at -1705,18471 h60
  text "REV" at 715,18471 h60
  text "ZONE" at 1045,18471 h60
  text "E" at 28919.92,18468.57 h76
  text "R" at 28969.94,18468.57 h76
  text "A" at 29016.61,18468.57 h76
  text "S" at 29081.63,18468.57 h76
  text "T" at 29124.97,18468.57 h76
  text "H" at 29173.32,18468.57 h76
  text "G" at 29228.33,18468.57 h76
  text "I" at 29248.34,18468.57 h76
  text "R" at 29296.68,18468.57 h76
  text "O" at 29371.7,18468.57 h76
  text "N" at 29421.71,18468.57 h76
  text "." at 29460.06,18468.57 h76
  text "E" at 29506.74,18468.57 h76
  text "L" at 29545.08,18468.57 h76
  text "O" at 29600.09,18468.57 h76
  text "H" at 29648.44,18468.57 h76
  text "W" at 29716.79,18468.57 h76
  text "N" at 29783.47,18468.57 h76
  text "I" at 29803.48,18468.57 h76
  text "D" at 29871.83,18468.57 h76
  text "E" at 29918.5,18468.57 h76
  text "T" at 29961.85,18468.57 h76
  text "U" at 30011.86,18468.57 h76
  text "B" at 30058.54,18468.57 h76
  text "I" at 30078.54,18468.57 h76
  text "R" at 30126.89,18468.57 h76
  text "T" at 30169.54,18468.57 h76
  text "S" at 30216.22,18468.57 h76
  text "I" at 30234.56,18468.57 h76
  text "D" at 30284.57,18468.57 h76
  text "Y" at 30351.25,18468.57 h76
  text "L" at 30389.6,18468.57 h76
  text "E" at 30436.27,18468.57 h76
  text "E" at 30481.28,18468.57 h76
  text "R" at 30531.3,18468.57 h76
  text "F" at 30574.64,18468.57 h76
  text "E" at 30641.32,18468.57 h76
  text "B" at 30688,18468.57 h76
  text "APPROVED" at -2210,18466 h60
  text "DESCRIPTION" at -300,18466 h60
  text "." at 28767.96,18388.55 h76
  text "N" at 28816.31,18388.55 h76
  text "E" at 28862.98,18388.55 h76
  text "V" at 28909.66,18388.55 h76
  text "I" at 28929.67,18388.55 h76
  text "G" at 28984.68,18388.55 h76
  text "E" at 29045.93,18388.55 h76
  text "E" at 29092.61,18388.55 h76
  text "T" at 29135.95,18388.55 h76
  text "N" at 29184.3,18388.55 h76
  text "A" at 29230.98,18388.55 h76
  text "R" at 29280.99,18388.55 h76
  text "A" at 29327.67,18388.55 h76
  text "W" at 29396.02,18388.55 h76
  text "D" at 29462.7,18388.55 h76
  text "E" at 29509.38,18388.55 h76
  text "I" at 29529.38,18388.55 h76
  text "L" at 29566.06,18388.55 h76
  text "P" at 29612.74,18388.55 h76
  text "M" at 29671.09,18388.55 h76
  text "I" at 29691.09,18388.55 h76
  text "R" at 29759.44,18388.55 h76
  text "O" at 29814.45,18388.55 h76
  text "S" at 29879.47,18388.55 h76
  text "S" at 29926.15,18388.55 h76
  text "E" at 29972.83,18388.55 h76
  text "R" at 30022.84,18388.55 h76
  text "P" at 30069.52,18388.55 h76
  text "X" at 30114.53,18388.55 h76
  text "E" at 30161.21,18388.55 h76
  text "R" at 30231.22,18388.55 h76
  text "O" at 30286.24,18388.55 h76
  text "D" at 30354.59,18388.55 h76
  text "E" at 30401.26,18388.55 h76
  text "V" at 30447.94,18388.55 h76
  text "R" at 30497.96,18388.55 h76
  text "E" at 30544.63,18388.55 h76
  text "S" at 30591.31,18388.55 h76
  text "E" at 30637.99,18388.55 h76
  text "R" at 30688,18388.55 h76
  text "ORIGINAL" at -375,18336 h60
  text "A" at 685,18336 h60
  text "A" at -2775,15901 h250
  text "A" at 30900,15901 h250
  text "B" at -2775,10551 h250
  text "B" at 30900,10551 h250
  text "C" at -2775,5201 h250
  text "C" at 30900,5201 h250
  text "DWG. NO." at -2815,3745.9 h30 r90
  text ".PCB_DWG_NO" at -2725,3531 h50 r90
  text "REV:" at -2815,2735.9 h30 r90
  text "D" at -2775,-149 h250
  text "D" at 30900,-149 h250
  text "REV:" at -2485,-2310 h45
  text "DWG NO:" at -925,-2310 h45
  text "CAGE CODE:" at 75,-2310 h45
  text "SIZE:" at 320,-2310 h45
  text ".PCB_DWG_NO" at -1235,-2450 h100
  text "B" at 280,-2455 h100
  text ".CAGE_CODE" at -95,-2465 h100
  text "SHEET:" at -1965,-2625.1 h45
  text "FILE NAME:" at -225,-2625.1 h45
  text "SCALE:" at 380,-2625 h45
  text ".Printout_Name" at 30644,-2646 h150
  text ".Printout_Name" at 30644,-2646 h150
  text ".Printout_Name" at 30644,-2646 h150
  text ".PCB_FILE_NAME_NO_PATH" at -568,-2670.1 h60
  text "OF" at -2415,-2675.1 h45
  text ".PCB_SCALE" at 110,-2675 h60
  text "DOC-104 REV A" at 30700,-2741.1 h20
  text "DOC-104 REV A" at 30700,-2741.1 h20
  text "DOC-104 REV A" at 30700,-2741.1 h20
  text "4" at 1400,-2924 h250
  text "3" at 9750,-2924 h250
  text "2" at 18100,-2924 h250
  text "1" at 26475,-2924 h250

## Dimensions
0,0 to 196.85,196.85 on 16_BOTTOM_COURTYARD
0,0 to 196.85,196.85 on 16_BOTTOM_COURTYARD

## Panel: embedded boards
"1SL1 Xilinx Spartan-11E PQ208.PcbDoc" at 2000,2000, 5 rows x 2 columns, spacing 2082.61 x 7181.04, rotation 0